# Altium PCB TSAL.PcbDoc
Units mm, origin at the board's own origin, x right, y up, seen from the top; angles counter-clockwise.
Board outline 61.47 x 37.72 mm, 2 copper layers (Top Layer, Bottom Layer); 20 components, 17 nets, 54 pads, 2 vias.
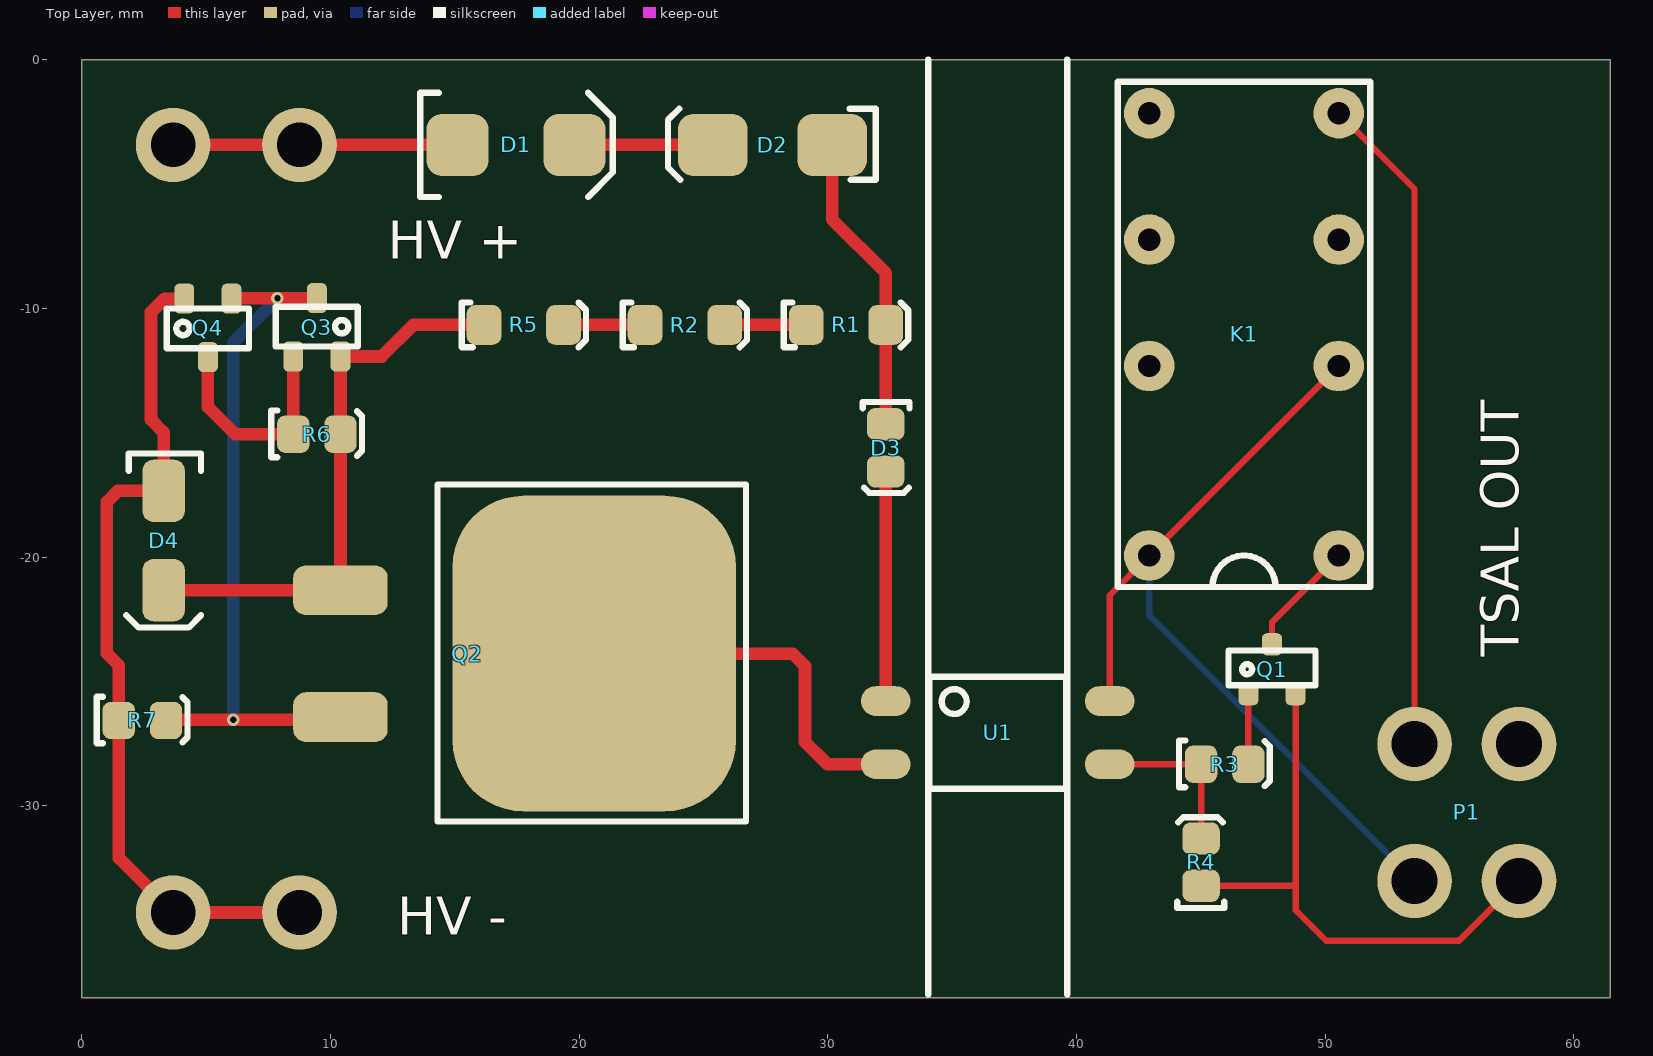
[diagram p0: Top Layer view]
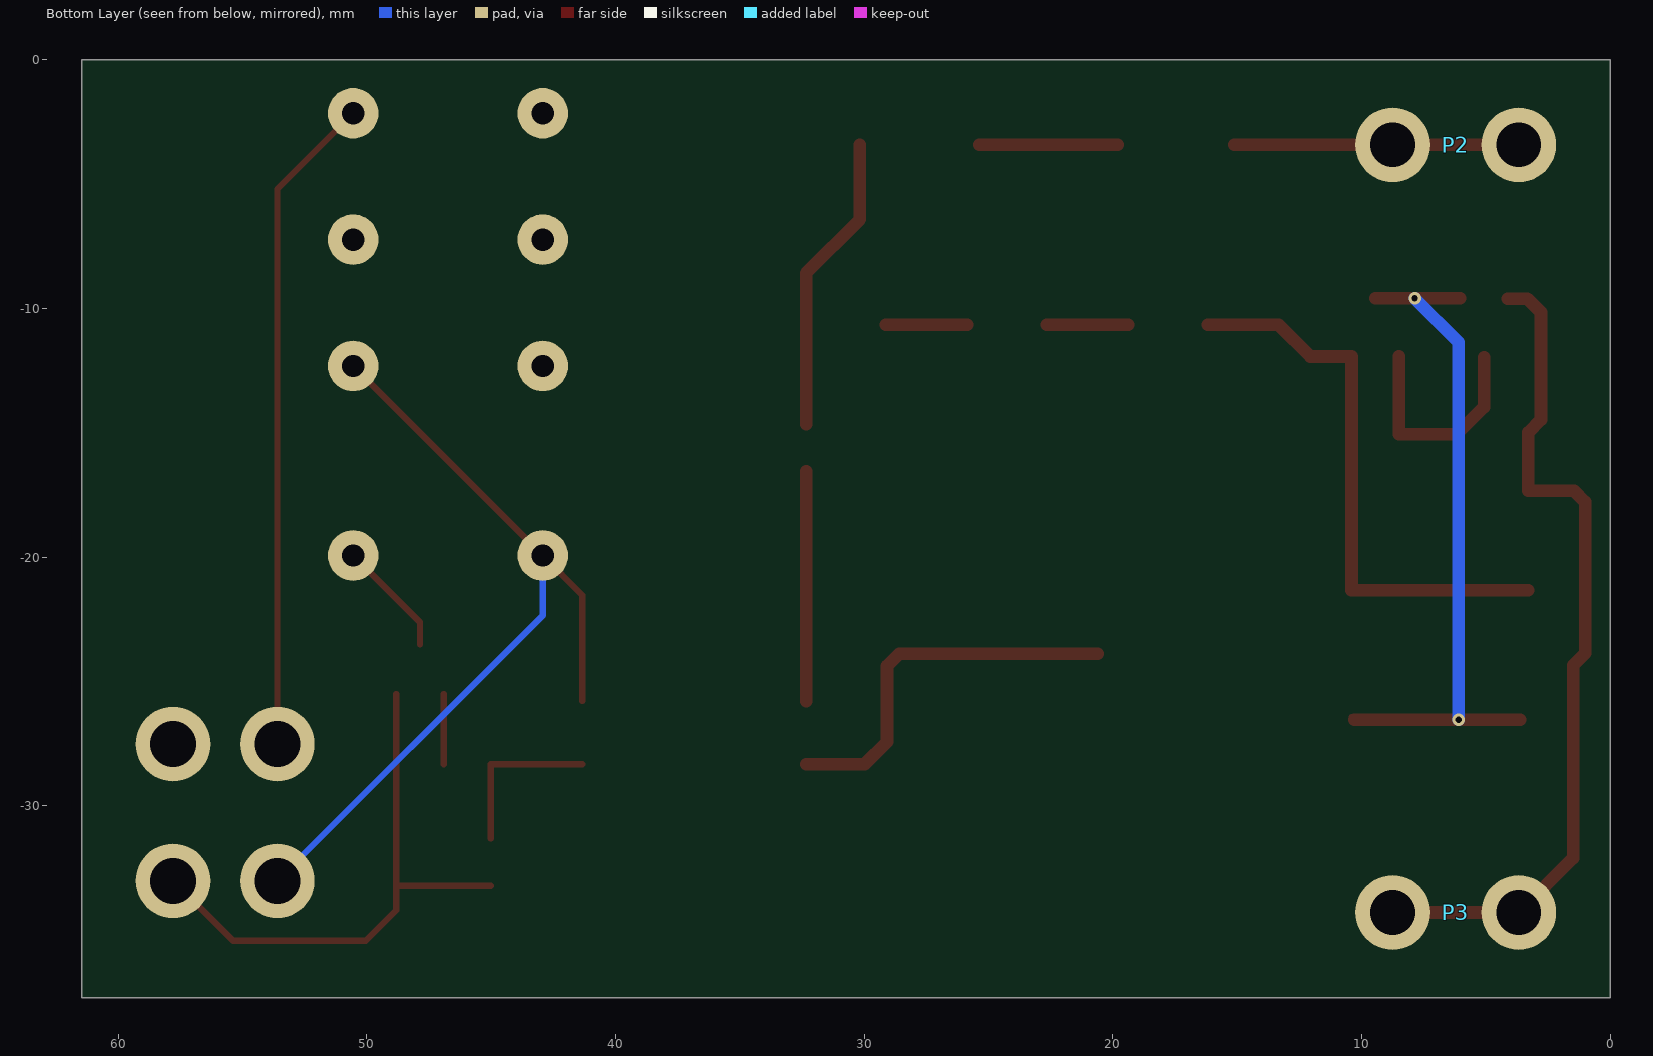
[diagram p1: Bottom Layer view, seen from below]
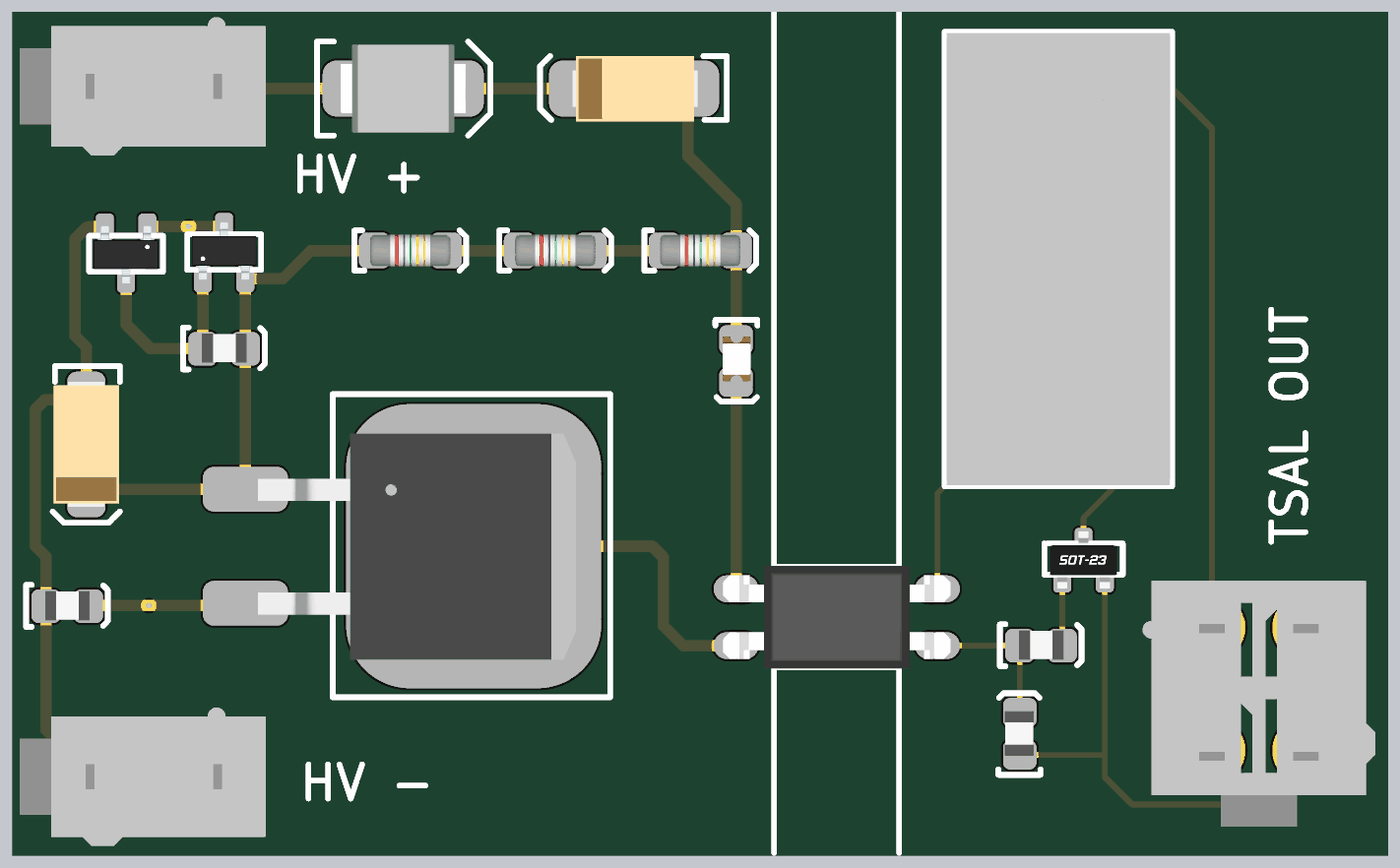
[diagram p2: 3D render of the assembled board from above, using the file's embedded part models]

## Layer stack, top to bottom
Top Solder: solder mask 0.0102, Solder Resist, Dk 3.5
Top Layer: signal copper 0.0356
Dielectric 1: dielectric 0.32, FR-4, Dk 4.8
Bottom Layer: signal copper 0.0356
Bottom Solder: solder mask 0.0102, Solder Resist, Dk 3.5

## Board outline
0,-37.719 0,0 61.468,0 61.468,-37.719

## Design rules (kind name [scope] priority, off if disabled: settings)
Clearance [All] p1: gap=0.254 ignorepadtopadclearanceinfootprint=FALSE
PolygonConnect [All] p1: connectstyle=Relief reliefconductorwidth=0.254 reliefentries=4 polygonreliefangle="90 Angle" airgapwidth=0.254
RoutingVias [All] p1: holewidth=0.711 width=1.27 viastyle="Through Hole" minholewidth=0.711 minwidth=1.27 maxholewidth=0.711 maxwidth=1.27
SolderMaskExpansion [All] p1: expansion=0.102 istentingtop=FALSE
Width [All] p1: maxlimit=0.254 minlimit=0.254 preferedwidth=0.254
30 further rules are at their usual default settings.

## Components (designator, comment, footprint, x,y, rotation, side; value= is the part's Value field where it differs from the comment)
D1 "SD560BTR" "SMB Diode" 15.362,-3.429 r0 top
D2 "1SMB5942B-13" "DI SMB Diode" 29.925,-3.429 r180 top
D3 "Orange" "0805 LED" 32.36,-15.621 r270 top
D4 "SMAZ5V6-13-F" "DI SMA Diode" 3.302,-17.336 r270 top
K1 "V23105A5303A201" "TI 2-DIL" 46.736,-11.049 r90 top
P1 "39293046" 39293046 53.594,-27.52 r180 top
P2 "39293026" 39293026 6.223,-3.429 r90 bottom
P3 "39293026" 39293026 6.223,-34.29 r90 bottom
Q1 "BC817-16LT1" "ON SOT-23 BJT" 47.862,-24.511 r0 top
Q2 "R6015ENJTL" "R TO-263 N-MOSFET" 20.61,-23.886 r270 top
Q3 "BC858ALT1G" "ON TO-236-3 BJT" 9.46,-9.738 r180 top
Q4 "BC848ALT1G" "ON TO-236-3 BJT" 5.08,-11.811 r0 top
R1 "330K" "VB 0204" 30.734,-10.668 r0 top
R2 "330K" "VB 0204" 24.257,-10.668 r0 top
R3 "2k" 0805 45.974,-28.305 r0 top
R4 "20k" 0805 44.986,-32.258 r90 top
R5 "330K" "VB 0204" 17.78,-10.668 r0 top
R6 "10k" 0805 9.472,-15.036 r0 top
R7 "240R" 0805 2.459,-26.543 r0 top
U1 "LTV-817S-TA1" "ON 4-SMD" 37.084,-27.061 r0 top

## Footprints (in the part's own frame and the unit in brackets; to place one, negate y for a bottom-side part, rotate by r counter-clockwise, add the part's x,y. Pads: shape width x height; smd on the part's side, far side on the other; paste and mask are expansions set on the pad)
0805 [mm]
  rrect50% 1.3x1.5 smd: 1(-0.962,-0.026) 2(0.938,-0.026)
  silkscreen extent -1.85,-0.95 1.8,0.93, body extent -1,-0.65 1,0.66, height 0.73
"0805 LED" [mm]
  rrect50% 1.3x1.5 smd: A(-0.962,-0.026) K(0.938,-0.026)
  silkscreen extent -1.85,-0.95 1.8,0.93, body extent -1.1,-0.62 0.9,0.62, height 1
39293026 [mm]
  round 3 hole 1.8: 1(0,-2.54) 1(0,2.54)
  body extent -3,-5.9 3.2,5.1, height 12.8
39293046 [mm]
  round 3 hole 1.85: 1(0,0) 2(0,5.5) 3(-4.2,0) 4(-4.2,5.5)
  body extent -7.3,-2.1 3.1,8.9, height 3.5
"DI SMA Diode" [mm]
  rrect50% 2.5x1.7 smd: A(0,0) K(4,0)
  silkscreen extent -1.5,-1.5 5.5,1.5, body extent -0.8,-1.46 4.79,1.46, height 2.35
"DI SMB Diode" [mm]
  rrect50% 2.8x2.5 smd: A(-0.25,0) K(4.55,0)
  silkscreen extent -2,-1.45 6.35,1.4, body extent -0.69,-1.45 4.89,1.47, height 2.35
"ON 4-SMD" [mm] "SOP, 4-Leads, Body 3.85x4.4mm, Pitch 2.54mm, IPC Medium Density"
  oval 2x1.2 smd: 1(-4.75,1.27) 2(-4.75,-1.27) 3(4.25,-1.27) 4(4.25,1.27)
  silkscreen extent -3,-2.25 2.5,2.25, body extent -5.33,-2.3 4.83,2.3, height 4.6
"ON SOT-23 BJT" [mm] "NUP2105L"
  rrect50% 0.8x0.9 smd: B(-0.95,-1) C(0,1) E(0.95,-1)
  silkscreen extent -1.75,-0.65 1.75,0.75, body extent -1.5,-1.27 1.5,1.28, height 1
"ON TO-236-3 BJT" [mm]
  rrect50% 0.8x1.2 smd: B(0.95,2.2) C(0,-0.15) E(-0.95,2.2)
  silkscreen extent -1.65,0.2 1.65,1.8, body extent -1.45,-0.35 1.45,2.25, height 1
"R TO-263 N-MOSFET" [mm]
  rrect50% 12.7x11.4 smd: D(0,0)
  rrect50% 2x3.8 smd: G(-2.55,-10.2) S(2.55,-10.2)
  silkscreen extent -6.8,-6.3 6.75,6.1, body extent -5.03,-9.64 5.08,4.56, height 4.7
"SMB Diode" [mm]
  rrect50% 2.5x2.5 smd: A(-0.25,0) K(4.45,0)
  silkscreen extent -1.75,-2.1 6,2.1, body extent -0.69,-1.97 4.9,1.97, height 2.5
"TI 2-DIL" [mil]
  round 80 hole 35.43: 1(-350,-150) 4(-50,-150) 6(150,-150) 8(350,-150) 9(350,150) 11(150,150) 13(-50,150) 16(-350,150)
  silkscreen extent -400,-200 400,200, body extent -398,-197 398,197, height 450
"VB 0204" [mm]
  rrect50% 1.4x1.6 smd: 1(-1.6,0) 2(1.6,0)
  silkscreen extent -2.5,-0.9 2.5,0.9, body extent -1.8,-0.7 1.8,0.7, height 1.4

## Part data
D1: "1.2V_F 600V 5A SMB", Digikey Part Number=1655-1530-2-ND, Manufacturer="SMC Diode Solutions", Digikey Link=https://www.digikey.com/product-detail/en/smc-diode-solutions/SD560BTR/1655-1530-2-ND/6022620, Part Number=SD560BTR
D2: "DIODE ZENER 51V 3W SMB", Digikey Part Number=1SMB5942B-13DICT-ND, Manufacturer="Diodes Inc", Digikey Link=https://www.digikey.com/product-detail/en/diodes-incorporated/1SMB5942B-13/1SMB5942B-13DICT-ND/5054245, Part Number=1SMB5942B-13
D3: library part SML-211DTT86, "Orange LED Indication - Discrete 1.75V 0805 (2012 Metric)", Digikey Part Number=511-1291-1-ND, Manufacturer="ROHM Semiconductor", Colour=Orange, Digikey Link=https://www.digikey.com/product-detail/en/rohm-semiconductor/SML-211DTT86/511-1291-1-ND/637104, Part Number=SML-211DTT86
D4: "DIODE ZENER 5.6V 1W SMA", Digikey Part Number=SMAZ5V6-FDICT-ND, Manufacturer="Diodes Inc", Digikey Link=https://www.digikey.com/product-detail/en/diodes-incorporated/SMAZ5V6-13-F/SMAZ5V6-FDICT-ND/755500, Part Number=SMAZ5V6-13-F
K1: "RELAY TELECOM DPDT 3A 12V", Digikey Part Number=PB387-ND, Manufacturer="TE Connectivity", Digikey Link=https://www.digikey.com/product-detail/en/te-connectivity-potter-brumfield-relays/V23105A5303A201/PB387-ND/291023, Part Number=V23105A5303A201
P1: Digikey Part Number=WM3844-ND, Angle=0, Contact=Tin, Flange=No, Part Number=39293046, Pitch=4.2mm, Positions=4, Row Spacing=5.5mm
P2 P3: Digikey Part Number=WM3843-ND, Angle=0, Contact=Tin, Flange=No, Part Number=39293026, Pitch=4.2mm, Positions=2, Row Spacing=5.5mm
Q1: "300mW  BJT NPN Transistor", Digikey Part Number=BC817-16LT1OSTR-ND, Manufacturer="ON Semiconductor", Digikey Link=https://www.digikey.com.au/product-detail/en/on-semiconductor/BC817-16LT1/BC817-16LT1OSTR-ND/606178, Part Number=BC817-16LT1
Q2: "MOSFET N-CH 600V 15A LPT", Digikey Part Number=R6015ENJTLCT-ND, Manufacturer="Rohm Semiconductor", Digikey Link=https://www.digikey.com.au/product-detail/en/rohm-semiconductor/R6015ENJTL/R6015ENJTLCT-ND/5042516, LatestRevisionDate=29-May-2009, LatestRevisionNote="IPC-7351 Footprint Added.", PackageDescription="4-Pin SOT-343 Package 1.3 mm Pitch, 2.1 mm Lead Span", PackageReference=SOT-343, PackageVersion=Sep-2000, Part Number=R6015ENJTL, Published=24-Mar-1999, Publisher="Altium Limited"
Q3: "TRANS PNP 30V 0.1A SOT-23", Digikey Part Number=BC858ALT1GOSCT-ND, Manufacturer="ON Semiconductor", Digikey Link=https://www.digikey.com.au/product-detail/en/on-semiconductor/BC858ALT1G/BC858ALT1GOSCT-ND/3462248?fbclid=IwAR0XE0JmsZu1bfxkpmh7_fMKeVVYT41RbargOB6Kv0hZlYRUvP_HzrN_yXU, Part Number=BC858ALT1G
Q4: "TRANS NPN 30V 0.1A SOT23", Digikey Part Number=BC848ALT1GOSCT-ND, Manufacturer="ON Semiconductor", Digikey Link=https://www.digikey.com/product-detail/en/on-semiconductor/BC848ALT1G/BC848ALT1GOSCT-ND/917837, Part Number=BC848ALT1G
R1 R2 R5: library part MMA02040C3303FB300, Digikey Part Number=MMA-330KACT-ND, Manufacturer="Vishay Beyschlag", Rated Voltage=0.4W, Tolerance=0.01, Part Number=MMA02040C3303FB300
R3: library part RC0805FR072KL, Digikey Part Number=311-2.00KCRCT-ND, Manufacturer=YAGEO, Rated Voltage=0.125W, Tolerance=0.01, Material=FR-07, Part Number=RC0805FR072KL
R4: library part RC0805FR0720KL, Digikey Part Number=311-20.0KCRCT-ND, Manufacturer=YAGEO, Rated Voltage=0.125W, Tolerance=0.01, Material=FR-07, Part Number=RC0805FR0720KL
R6: library part RC0805FR0710KL, Digikey Part Number=311-10.0KCRCT-ND, Manufacturer=YAGEO, Rated Voltage=0.125W, Tolerance=0.01, Material=FR-07, Part Number=RC0805FR0710KL
R7: library part RC0805FR07240RL, Digikey Part Number=311-240CRCT-ND, Manufacturer=YAGEO, Rated Voltage=0.125W, Tolerance=0.01, Material=FR-07, Part Number=RC0805FR07240RL
U1: "35V 50ma Optocoupler (VF=1.2V)", Digikey Part Number=160-1893-2-ND, Manufacturer="Lite-On Inc", Digikey Link=https://www.digikey.com/product-detail/en/lite-on-inc/LTV-817S-TA1/160-1893-2-ND/388451, Part Number=LTV-817S-TA1

## Via types
v1: diameter 0.5, hole 0.25, Top Layer to Bottom Layer, 2 vias

## Nets (pads, with @x,y where several pads share a name; then routed paths per layer and width w, separated by ;. In a path a pad name is that pad's centre, name@x,y a point inside that pad or via, vN(x,y) a via of type N, cw(c..) or ccw(c..) an arc to the next point about the centre after c; other vN are vias at no path point)
GLV+: K1.4 K1.16 P1.2 U1.4 | length 34.8
  Top Layer w0.254: U1.4 41.334,-21.531 K1.16 K1.4
  Bottom Layer w0.254: K1.16 42.926,-22.352 P1.2
GLV-: P1.4 Q1.E R4.1 | length 23
  Top Layer w0.254: R4.1 48.758,-33.22 48.812,-33.274 ; Q1.E 48.812,-33.274 ; P1.4 55.381,-35.433 50.993,-35.433 50.038,-35.433 48.812,-34.207 48.812,-33.274
NetD1_A: D1.A P2.1 | length 11.4
  Top Layer w0.508: P2.1@3.744,-3.429 9.244,-3.429 D1.A
NetD1_K: D1.K D2.K | length 5.6
  Top Layer w0.508: D1.K D2.K
NetD2_A: D2.A D3.A R1.2 | length 12.1
  Top Layer w0.508: D2.A 30.175,-6.426 32.334,-8.585 R1.2 D3.A
NetD3_K: D3.K U1.1 | length 9.2
  Top Layer w0.508: U1.1 D3.K
NetD4_A: D4.A P3.1 Q4.E R7.1 | length 34.1
  Top Layer w0.508: Q4.E 3.343,-9.611 2.794,-10.16 2.794,-14.478 3.302,-14.986 D4.A 1.46,-17.336 1.016,-17.78 1.016,-23.876 1.497,-24.357 R7.1 1.497,-32.104 3.683,-34.29 P3.1@8.763,-34.29
NetD4_K: D4.K Q2.G Q3.E R5.1 R6.2 | length 22.8
  Top Layer w0.508: D4.K Q2.G R6.2 Q3.E 12.065,-11.938 13.335,-10.668 R5.1
NetK1_1: K1.1 Q1.C | length 4.7
  Top Layer w0.254: Q1.C 47.862,-22.623 K1.1
NetQ1_B: Q1.B R3.2 | length 2.8
  Top Layer w0.254: R3.2 Q1.B
NetQ2_D: Q2.D U1.2 | length 15.4
  Top Layer w0.508: Q2.D 28.585,-23.886 29.083,-24.384 29.083,-27.432 29.982,-28.331 U1.2
NetQ2_S: Q2.S Q3.C Q4.B R7.2 | length 28
  Top Layer w0.254: R7.2@3.605,-26.569 R7.2@3.634,-26.54 ; Q4.B Q4.B@6.041,-9.6 ; Q3.C@9.448,-9.6 Q3.C ; Q2.S@10.306,-26.54 Q2.S
  Top Layer w0.508: R7.2@3.634,-26.54 Q2.S@10.306,-26.54 ; Q4.B@6.041,-9.6 v1(7.874,-9.6) Q3.C@9.448,-9.6
  Bottom Layer w0.508: v1(6.096,-26.543) 6.096,-11.378 v1(7.874,-9.6)
NetQ3_B: Q3.B Q4.C R6.1 | length 9
  Top Layer w0.508: Q4.C 5.08,-13.97 6.172,-15.062 R6.1 Q3.B
NetR1_1: R1.1 R2.2 | length 3.3
  Top Layer w0.508: R2.2 R1.1
NetR2_1: R2.1 R5.2 | length 3.3
  Top Layer w0.508: R5.2 R2.1
NetR3_1: R3.1 R4.2 U1.3 | length 6.7
  Top Layer w0.254: U1.3 R3.1 R4.2
TSAL_RED_GND: K1.8 P1.1 | length 26.6
  Top Layer w0.254: K1.8 53.594,-5.207 P1.1
pads on no net: K1.6 K1.9 K1.11 K1.13 P1.3

## Silkscreen, mask and mechanical layers (free items; w line width, h text height)
Top Overlay:
  lines w0.254: 34.036,-37.592 34.036,-21.463 34.036,-7.112 34.036,-2.159 34.036,0 ; 39.624,-37.592 39.624,-22.987 39.624,0
  text "HV +" at 12.319,-8.001 h1.52
  text "TSAL OUT" at 57.785,-24.003 h1.52 r90
  text "HV -" at 12.7,-35.179 h1.52
Mechanical 1:
  the board outline again, w0.254